# EAGLE board encorder_slave_for_steering_ver_1.0 (EAGLE 6.4)
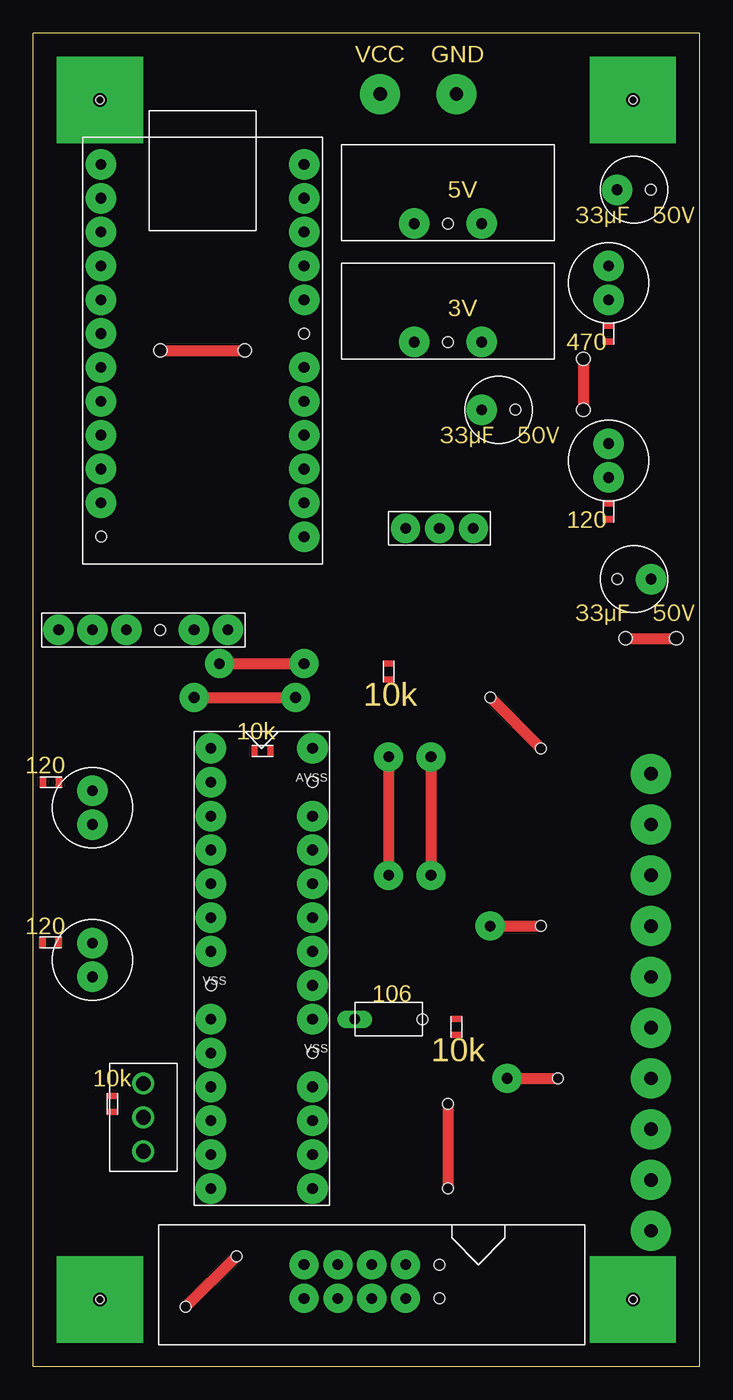
[diagram p0: board, top side]
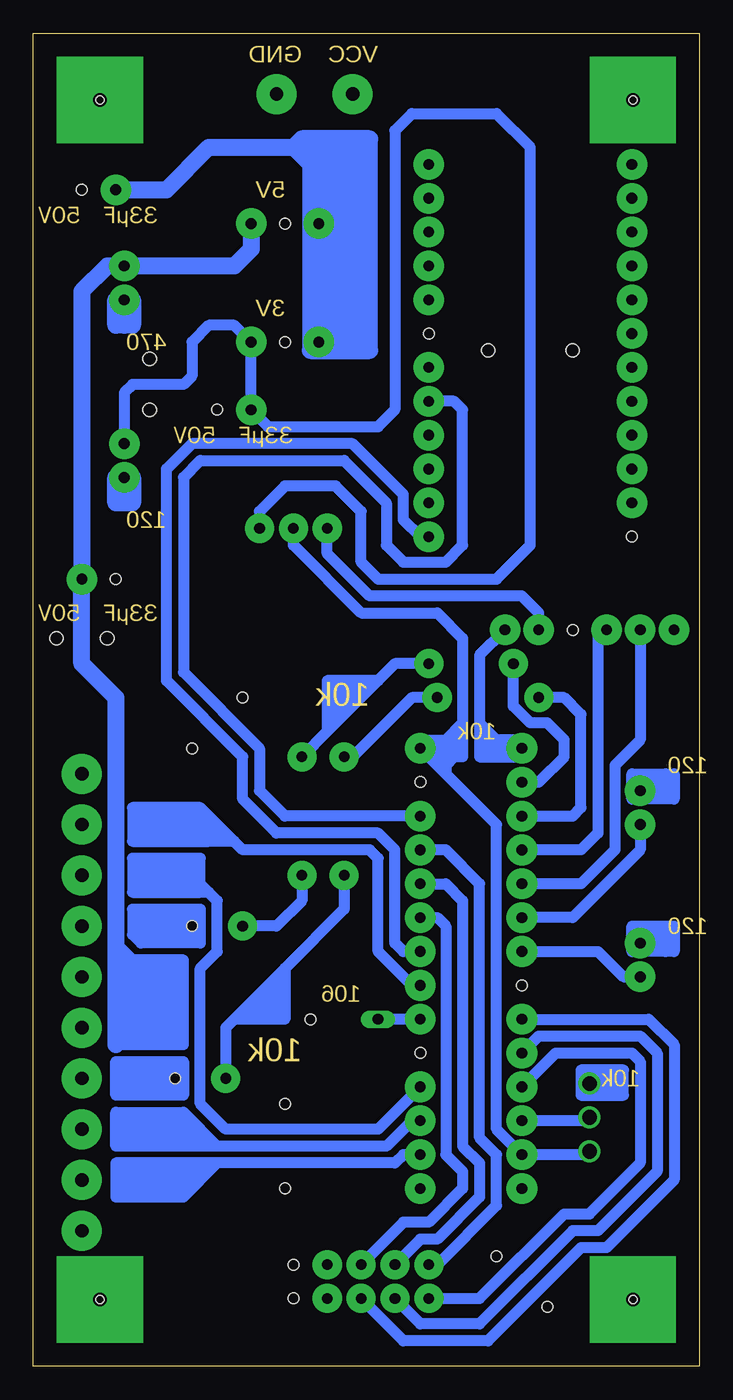
[diagram p1: board, bottom side, seen from below]

Size 50 x 100 mm. Coordinates in mm from the lower left corner, seen from the top.
Outline: 0,0 50,0 50,100 0,100 0,0
Copper layers (1*16): Top 0.035mm / dielectric 1.5mm / Bottom 0.035mm
Design rules "default": minimum track width 10mil, minimum drill 24mil, track to track 8mil, track to pad 8mil, pad to pad 8mil, via to via 8mil, smd to smd 8mil, copper to edge 40mil, drill to drill 8mil, minimum pad ring 10mil, minimum via ring 8mil, stop-mask expansion 4mil, vias tented up to drill 0mil, thermal gap 10mil
Holes 0.6 mm at 5,5 45,5 45,95 5,95
Holes 1 mm at 41.27,75.56 41.27,71.75 15.88,76.2 9.53,76.2 44.45,54.61 48.26,54.61
Holes 0.8 mm at 39.37,21.59 38.1,33.02 31.11,19.68 31.11,13.34 15.24,8.26 11.43,4.45 34.29,50.16 38.1,46.35

## Footprints (pad centres in the part's own frame; a part is rotated, then mirrored left to right if it is on the bottom)
WRITER = drill 0.8 pad 2.286: P$1 -6.35,0; P$2 -3.81,0; P$4 1.27,0; P$5 3.81,0; P$6 6.35,0 | hole 0.8: -1.27,0
CAPACITORS_106 = drill 0.8 long: P$2 -2.54,0 | hole 0.8: 2.54,0
SERIALCOM = drill 0.8 pad 2.286: P$7 -7.62,1.27; P$8 -7.62,-3.81; P$9 -7.62,3.81; P$10 -7.62,-6.35; P$11 -7.62,6.35; P$12 -7.62,-8.89; P$13 -7.62,-11.43; P$14 -7.62,-13.97; P$15 -7.62,8.89; P$16 -7.62,11.43; P$17 -7.62,13.97; P$18 7.62,-1.27; P$19 7.62,-13.97; P$20 7.62,-11.43; P$21 7.62,-8.89; P$22 7.62,-6.35; P$23 7.62,-3.81; P$24 7.62,1.27; P$25 7.62,3.81; P$26 7.62,6.35; P$27 7.62,8.89; P$28 7.62,11.43 | hole 0.8: -7.62,-1.27; 7.62,13.97
LED = drill 0.8 pad 2.286: P$1 -1.27,0; P$2 1.27,0
TOGGLE_SWITCH(3PIN) = drill 1.1: P$1 2.54,1.52; P$2 2.54,4.06; P$3 2.54,6.6
REGULATOR = drill 0.8 pad 2.286: P$2 -2.54,1.27; P$3 2.54,1.27 | hole 0.8: 0,1.27
3PINSWITCH = drill 0.8 pad 2.184: P$1 -2.54,0; P$2 0,0; P$3 2.54,0
RIBBON_CABLE = drill 0.8 pad 2.184: P$1 -5.08,0; P$2 -2.54,0; P$3 0,0; P$4 2.54,0; P$5 -5.08,-2.54; P$6 -2.54,-2.54; P$7 0,-2.54; P$8 2.54,-2.54 | hole 0.8: 5.08,0; 5.08,-2.54
PIC_28P_2 = drill 0.8 pad 2.3: AVDD 3.81,16.51; MCLR -3.81,16.51; RA0 -3.81,13.97; RA1 -3.81,11.43; RA2 -3.81,-3.81; RA3 -3.81,-6.35; RA4 -3.81,-8.89; RB0 -3.81,8.89; RB1 -3.81,6.35; RB2 -3.81,3.81; RB3 -3.81,1.27; RB4 -3.81,-11.43; RB5 -3.81,-16.51; RB6 3.81,-16.51; RB7 3.81,-13.97; RB8 3.81,-11.43; RB9 3.81,-8.89; RB10 3.81,-1.27; RB11 3.81,1.27; RB12 3.81,3.81; RB13 3.81,6.35; RB14 3.81,8.89; RB15 3.81,11.43; VCAP 3.81,-3.81; VDD -3.81,-13.97 | hole 0.8: -3.81,-1.27; 3.81,-6.35; 3.81,13.97
CAPACITOR_33 = drill 0.8 pad 2.286: P$1 -1.27,0 | hole 0.8: 1.27,0

## Placement (x,y rotation side)
E$1  [WRITER]  8.26,55.24 180 top
E$2  [CAPACITORS_106]  26.67,26.04 0 top
E$3  [SERIALCOM]  12.7,76.2 180 top
E$4  [LED]  43.18,67.94 90 top
E$5  [TOGGLE_SWITCH(3PIN)]  5.71,14.61 0 top
E$6  [CHIP_RESISTOR]  43.18,77.47 90 top
E$7  [REGULATOR]  31.11,84.45 0 top
E$8  [REGULATOR]  31.11,75.56 0 top
E$10  [3PINSWITCH]  30.48,62.87 0 top
E$12  [RIBBON_CABLE]  25.4,7.62 0 top
E$13  [PIC_28P_2]  17.14,29.84 0 top
E$14  [CAPACITOR_33]  34.92,71.75 0 top
E$15  [CAPACITOR_33]  45.09,59.05 180 top
E$16  [LED]  4.45,30.48 90 top
E$17  [LED]  43.18,81.28 270 top
E$18  [LED]  4.45,41.91 90 top
E$19  [CHIP_RESISTOR]  43.18,64.14 90 top
E$20  [CAPACITOR_33]  45.09,88.27 0 top
U$1  CHIP_RESISTOR  [CHIP_RESISTOR]  31.75,25.45 90 top
U$2  CHIP_RESISTOR  [CHIP_RESISTOR]  26.67,52.12 90 top
U$16  CHIP_RESISTOR  [CHIP_RESISTOR]  17.2,46.16 180 top
U$17  CHIP_RESISTOR  [CHIP_RESISTOR]  5.94,19.68 90 top
U$21  CHIP_RESISTOR  [CHIP_RESISTOR]  1.28,31.8 180 top
U$22  CHIP_RESISTOR  [CHIP_RESISTOR]  1.32,43.81 0 top

## Library data of the parts
E$1-E$4 E$6-E$8 E$10 E$12 E$14-E$20 U$1 U$2 U$16 U$17 U$21 U$22 = oohira_new
E$5 = inogu
E$13 = N_MicroComputer

## Nets
S$1: E$2.P$2 E$13.VCAP
S$3: E$1.P$5 E$13.RB1
S$4: E$1.P$4 E$13.RB0
S$5: E$12.P$5 E$13.RA4
S$6: E$12.P$6 E$13.RA3
S$7: E$12.P$7 E$13.RA2
S$10: E$12.P$1 E$13.RB14
S$12: E$5.P$1 E$10.P$2 E$13.AVDD E$13.VDD
S$13: E$5.P$2 E$13.RB4
S$14: E$13.RB3 E$16.P$1
S$19: E$12.P$2 E$13.RB13
S$20: E$12.P$3 E$13.RB12
S$21: E$13.RB2 E$18.P$1
S$22: E$1.P$2 E$10.P$1
S$24: E$13.RB7
S$25: E$13.RB8
S$26: E$13.RA1
S$28: E$13.RB9
S$39: E$13.RA0
S$42: E$13.RB10
S$57: E$1.P$1 E$13.MCLR
S$70: E$3.P$9 E$13.RB15
S$78: E$3.P$17 E$13.RB11
S$81: E$20.P$1
S$82: E$7.P$3 E$15.P$1 E$17.P$1
S$84: E$4.P$2 E$8.P$3 E$10.P$3 E$14.P$1

## Tracks (layer width: path | path; a pad name or v marks a point on that pad's centre or on a via)
S$1
  Bottom 0.813: E$13.VCAP E$2.P$2
S$2
  Bottom 0.813: 2.54,31.11 1.91,31.11 1.91,33.02 5.08,33.02 5.08,31.75 | 2.54,31.11 5.08,31.11 5.08,31.75 | 2.54,31.11 2.54,32.38 3.81,32.38 | 5.08,32.38 3.81,32.38 | 3.81,32.38 3.17,31.75 5.08,31.75
S$3
  Bottom 0.813: E$1.P$5 4.45,46.99 6.35,45.09 6.35,38.73 8.89,36.2 E$13.RB1
S$4
  Bottom 0.813: E$1.P$4 7.62,54.61 7.62,40.01 8.89,38.73 E$13.RB0
S$5
  Bottom 0.813: E$13.RA4 10.79,23.5 5.08,23.5 4.45,22.86 4.45,15.24 8.26,11.43 10.16,11.43 16.51,5.08 E$12.P$5
S$6
  Bottom 0.813: E$13.RA3 12.06,24.77 4.45,24.77 3.17,23.5 3.17,14.61 7.62,10.16 9.53,10.16 16.51,3.17 20.95,3.17 E$12.P$6
S$7
  Bottom 0.813: E$13.RA2 3.81,26.04 1.91,24.13 1.91,13.97 6.99,8.89 8.89,8.89 15.88,1.91 22.23,1.91 E$12.P$7
S$9
  Bottom 0.813: 8.89,21.59 8.89,20.32 5.71,20.32 5.71,22.23 8.89,22.23 8.89,20.95 6.35,20.95 6.35,21.59 8.26,21.59
S$10
  Bottom 0.813: E$12.P$1 19.68,7.62 15.24,12.06 15.24,15.88 16.51,17.14 16.51,36.2 19.05,38.73 E$13.RB14
S$12
  Bottom 0.813: 17.78,46.99 17.78,45.72 18.41,45.72 | 18.41,45.72 20.95,45.72 E$13.AVDD | E$13.AVDD 20.95,46.99 19.05,46.99 | 19.05,46.99 18.41,46.99 | 18.41,46.99 18.41,46.35 | E$5.P$1 8.51,15.88 E$13.VDD 15.24,17.78 15.24,40.64 19.05,44.45 | 19.05,44.45 E$13.AVDD | E$13.AVDD 18.41,46.35 | 18.41,46.35 17.78,46.99 | 17.78,46.99 18.41,46.99 | 18.41,45.72 19.05,45.09 19.05,44.45 | 17.78,48.26 17.78,54.61 19.68,56.52 25.4,56.52 30.48,61.59 E$10.P$2 | 17.78,48.26 17.78,46.99 | 19.05,46.99 17.78,48.26
S$13
  Bottom 0.813: E$5.P$2 8.51,18.41 E$13.RB4
S$14
  Bottom 0.813: E$13.RB3 7.62,31.11 5.71,29.21 E$16.P$1
S$15  (via drill 1 pad 6.45)
  other vias: 5,95
S$16  (via drill 1 pad 6.45)
  other vias: 45,95
S$17  (via drill 1 pad 6.45)
  other vias: 5,5
S$18  (via drill 1 pad 6.45)
  other vias: 45,5
S$19
  Bottom 0.813: E$13.RB13 19.05,36.2 17.78,34.92 17.78,16.51 16.51,15.24 16.51,12.7 19.68,9.53 20.95,9.53 E$12.P$2
S$20
  Bottom 0.813: E$13.RB12 19.68,33.66 19.05,33.02 19.05,15.88 17.78,14.61 17.78,13.34 20.32,10.79 22.23,10.79 E$12.P$3
S$21
  Bottom 0.813: E$18.P$1 4.45,38.73 9.53,33.66 E$13.RB2
S$22
  Bottom 0.813: E$1.P$2 12.06,56.52 13.34,57.78 24.77,57.78 27.94,60.96 E$10.P$1
S$23
  Bottom 0.813: 2.54,44.45 1.91,44.45 1.91,42.55 5.08,42.55 5.08,43.81 | 5.08,43.81 5.08,44.45 2.54,44.45 | 2.54,44.45 2.54,43.18 4.45,43.18 3.17,43.81 5.08,43.81
S$24
  Bottom 0.813: E$13.RB7 22.23,15.88 22.86,15.24 36.2,15.24 | 36.83,15.24 43.81,15.24 43.81,12.7 38.73,12.7 36.2,15.24 | 36.2,15.24 36.83,15.24 | 36.83,15.24 38.73,13.34 43.18,13.34 43.18,14.61 38.1,14.61 38.1,13.97 42.55,13.97
S$25
  Bottom 0.813: E$13.RB8 21.59,18.41 23.5,16.51 36.2,16.51 | 43.18,16.51 43.81,16.51 43.81,19.05 38.73,19.05 36.2,16.51 | 36.2,16.51 43.18,16.51 | 43.18,16.51 43.18,18.41 38.73,18.41 38.73,17.14 | 38.73,17.14 40.01,17.14 42.55,17.14 42.55,17.78 37.47,17.78 37.47,17.14 38.73,17.14
S$26
  Bottom 0.813: E$13.RA1 9.53,41.27 8.89,41.91 8.89,48.9 10.16,50.16 12.06,50.16
S$28
  Bottom 0.813: E$13.RB9 24.13,17.78 35.56,17.78 37.47,19.68 37.47,29.84 36.2,31.11 36.2,34.92 36.83,35.56 | 37.47,36.2 37.47,38.1 42.55,38.1 42.55,35.56 38.1,35.56 37.47,35.56 | 37.47,35.56 37.47,36.2 | 37.47,36.2 41.91,36.2 41.91,36.83 | 41.91,36.83 41.91,37.47 38.1,37.47 38.1,36.83 41.91,36.83 | 36.83,35.56 37.47,36.2 | 36.83,35.56 37.47,35.56
S$29  (via drill 0.8 pad 2.18)
  Top 0.813: v12.06,50.16 v19.68,50.16 | v26.67,45.72 v26.67,36.83 | v35.56,21.59 39.37,21.59
  Bottom 0.813: v19.68,50.16 21.59,50.16 26.04,45.72 v26.67,45.72 | v26.67,36.83 26.67,34.29 31.11,29.84 | 31.11,29.84 34.29,26.67 | 34.92,26.04 35.56,25.4 v35.56,21.59 | 31.11,29.84 31.11,26.04 34.92,26.04 | 34.92,26.04 34.29,26.67 | 34.29,26.67 31.75,26.67 31.75,28.57 33.02,27.3 32.38,27.3
S$33
  Bottom 0.813: 38.73,20.95 38.73,20.32 43.81,20.32 43.81,22.86 38.73,22.86 38.73,20.95 | 38.73,20.95 43.18,20.95 43.18,22.23 39.37,22.23 39.37,21.59 42.55,21.59
S$34
  Top 0.813: 44.45,54.61 48.26,54.61
S$37  (via drill 1 pad 3)
  other vias: 31.75,95.44
S$38  (via drill 1 pad 3)
  other vias: 26.04,95.44
S$39  (via drill 0.8 pad 2.18)
  Top 0.813: v13.97,52.7 v20.32,52.7 | v29.84,45.72 v29.84,36.83 | v34.29,33.02 38.1,33.02
  Bottom 0.813: E$13.RA0 12.06,43.81 10.16,45.72 10.16,46.99 11.43,48.26 12.7,48.26 13.97,49.53 v13.97,52.7 | v20.32,52.7 22.86,52.7 24.13,51.44 | v29.84,36.83 29.84,34.92 31.75,33.02 v34.29,33.02 | 24.13,51.44 27.94,47.62 | 27.94,47.62 v29.84,45.72 | 24.13,51.44 27.94,51.44 27.94,48.26 27.3,48.9 | 27.3,48.9 27.3,50.8 25.4,50.8 26.67,49.53 | 27.3,48.9 26.67,49.53 | 26.67,49.53 26.67,50.16 27.94,48.9 27.94,47.62
S$40
  Top 0.813: 31.11,19.68 31.11,13.34
S$41
  Top 0.813: 11.43,4.45 15.24,8.26
S$42
  Bottom 0.813: 34.92,39.37 36.2,40.64 | 36.2,40.64 37.47,41.91 42.55,41.91 42.55,39.37 37.47,39.37 | 37.47,39.37 37.47,40.01 | 37.47,40.01 37.47,41.27 41.91,41.27 41.91,40.64 | 38.1,40.64 41.91,40.64 | 41.91,40.64 41.91,40.01 38.1,40.01 38.1,40.64 | 38.1,40.64 36.83,40.64 | 36.83,40.64 36.2,40.64 | 36.83,40.64 37.47,40.01 | 36.83,39.37 35.56,39.37 34.92,39.37 | 37.47,39.37 36.83,39.37 | 36.83,39.37 36.2,40.01 36.83,40.01 | E$13.RB10 21.59,28.57 24.13,31.11 24.13,38.1 24.77,38.73 34.29,38.73 34.92,39.37
S$43  (via drill 1 pad 3)
  other vias: 46.35,40.64 46.35,44.45
S$44  (via drill 1 pad 3)
  other vias: 46.35,17.78
S$45  (via drill 1 pad 3)
  other vias: 46.35,36.83
S$46  (via drill 1 pad 3)
  other vias: 46.35,33.02
S$47  (via drill 1 pad 3)
  other vias: 46.35,29.21
S$48  (via drill 1 pad 3)
  other vias: 46.35,25.4
S$50  (via drill 1 pad 3)
  other vias: 46.35,21.59
S$51  (via drill 1 pad 3)
  other vias: 46.35,13.97 46.35,10.16
S$52
  Top 0.813: 34.29,50.16 38.1,46.35
S$54
  Bottom 0.813: 42.55,32.38 41.91,31.75 37.47,31.75 37.47,34.29 42.55,34.29 42.55,32.38 | 42.55,32.38 38.1,32.38 38.1,33.66 41.91,33.66 41.91,33.02 38.73,33.02
S$57
  Bottom 0.813: 16.51,48.26 16.51,53.34 E$1.P$1 | 16.51,48.26 16.51,46.99 | E$13.MCLR 13.34,46.99 15.24,46.99 | 16.51,46.99 16.51,45.72 13.34,45.72 E$13.MCLR | E$13.MCLR 15.88,46.35 15.24,46.99 | 15.24,46.99 16.51,46.99 | 15.24,46.99 16.51,48.26
S$66
  Bottom 1.27: 29.21,90.17 29.21,76.2 24.77,76.2 24.77,92.08 29.84,92.08 30.48,91.44 29.21,90.17 | 29.21,90.17 26.04,90.17 25.4,90.81 28.57,90.81 29.21,91.44
S$70
  Bottom 0.813: E$3.P$9 18.41,72.39 17.78,71.75 17.78,61.59 19.05,60.33 22.23,60.33 23.5,61.59 23.5,64.77 26.67,67.94 37.47,67.94 38.73,66.67 38.73,52.07 33.02,46.35 33.02,43.18 31.11,41.27 E$13.RB15
S$71
  Top 0.813: 9.53,76.2 15.88,76.2
S$76
  Bottom 1.27: 43.18,78.11 42.55,78.11 42.55,80.01 43.18,80.01 | 43.18,78.11 43.81,78.11 43.81,80.01 43.18,80.01 | 43.18,80.01 43.18,78.11
S$77
  Bottom 1.27: 43.18,64.77 42.55,64.77 42.55,66.67 43.18,66.67 | 43.18,64.77 43.81,64.77 43.81,66.67 43.18,66.67 | 43.18,66.67 43.18,64.77
S$78
  Bottom 0.813: E$3.P$17 20.95,62.23 22.23,63.5 22.23,65.41 26.04,69.22 38.1,69.22 40.01,67.31 40.01,51.44 34.29,45.72 34.29,42.55 31.75,40.01 24.13,40.01 22.86,38.73 22.86,31.75 22.23,31.11 E$13.RB11
S$81
  Bottom 1.27: E$20.P$1 40.01,88.27 36.83,91.44 29.84,91.44
S$82
  Bottom 0.813: 43.81,24.13 38.73,24.13 38.73,30.48 42.55,30.48 | 42.55,30.48 43.18,30.48 43.18,24.77 39.37,24.77 39.37,29.84 42.55,29.84 42.55,25.4 40.01,25.4 40.01,29.21 41.91,29.21 41.91,26.04 40.64,26.04 40.64,28.57 41.27,28.57 41.27,26.67 | 42.55,30.48 43.81,31.75
  Bottom 1.27: E$7.P$3 33.66,83.82 34.92,82.55 E$17.P$1 44.45,82.55 46.35,80.64 E$15.P$1 46.35,52.7 43.81,50.16 43.81,31.75 43.81,24.13
S$83
  Top 0.813: 41.27,75.56 41.27,71.75
S$84
  Bottom 0.813: E$4.P$2 43.18,73.03 42.55,73.66 38.73,73.66 38.1,74.3 38.1,76.83 36.83,78.11 34.92,78.11 E$8.P$3 E$14.P$1 32.38,70.48 24.13,70.48 22.86,71.75 22.86,92.71 21.59,93.98 15.24,93.98 12.7,91.44 12.7,61.59 15.24,59.05 24.13,59.05 25.4,60.33 25.4,64.14 27.3,66.04 31.11,66.04 33.02,64.14 E$10.P$3
(copper drawn outside any net)
  shapes: Bottom area x1

## Text on the board
Dimension: VCC | GND | 5V | 33µF 50V | 3V | 470 | 33µF 50V | 120 | 33µF 50V | 10k | 10k | 120 | 120 | 106 | 10k | 10k